# Altium PCB PCB3 - Copy.PcbDoc
Units mm, origin at the board's own origin, x right, y up, seen from the top; angles counter-clockwise.
Board outline 118.36 x 117.86 mm, 2 copper layers (Top Layer, Bottom Layer); 105 components, 67 nets, 259 pads, 0 vias.
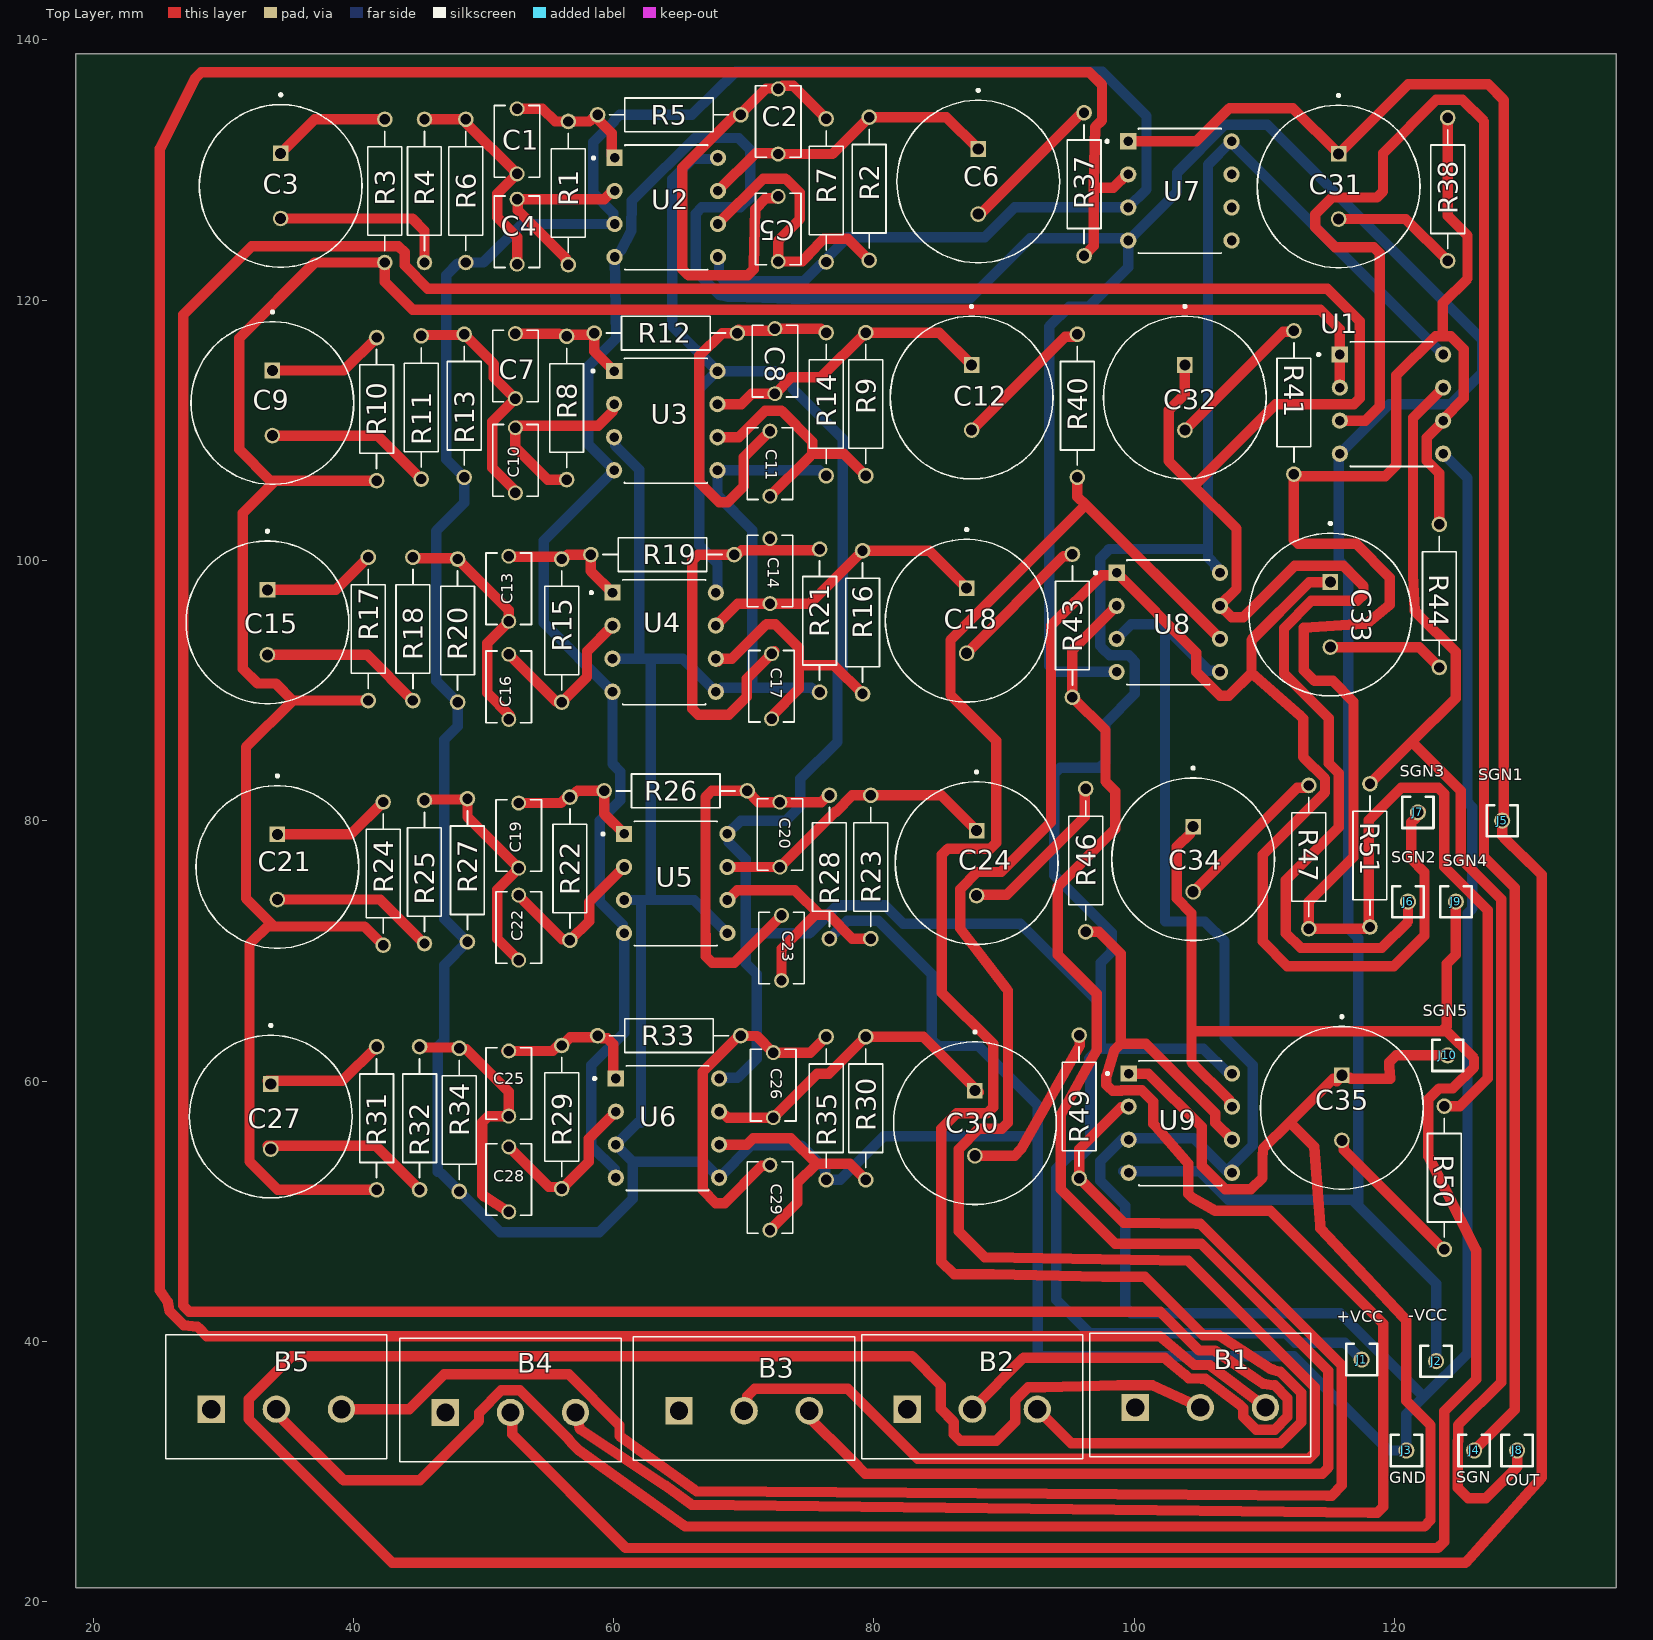
[diagram p0: Top Layer view]
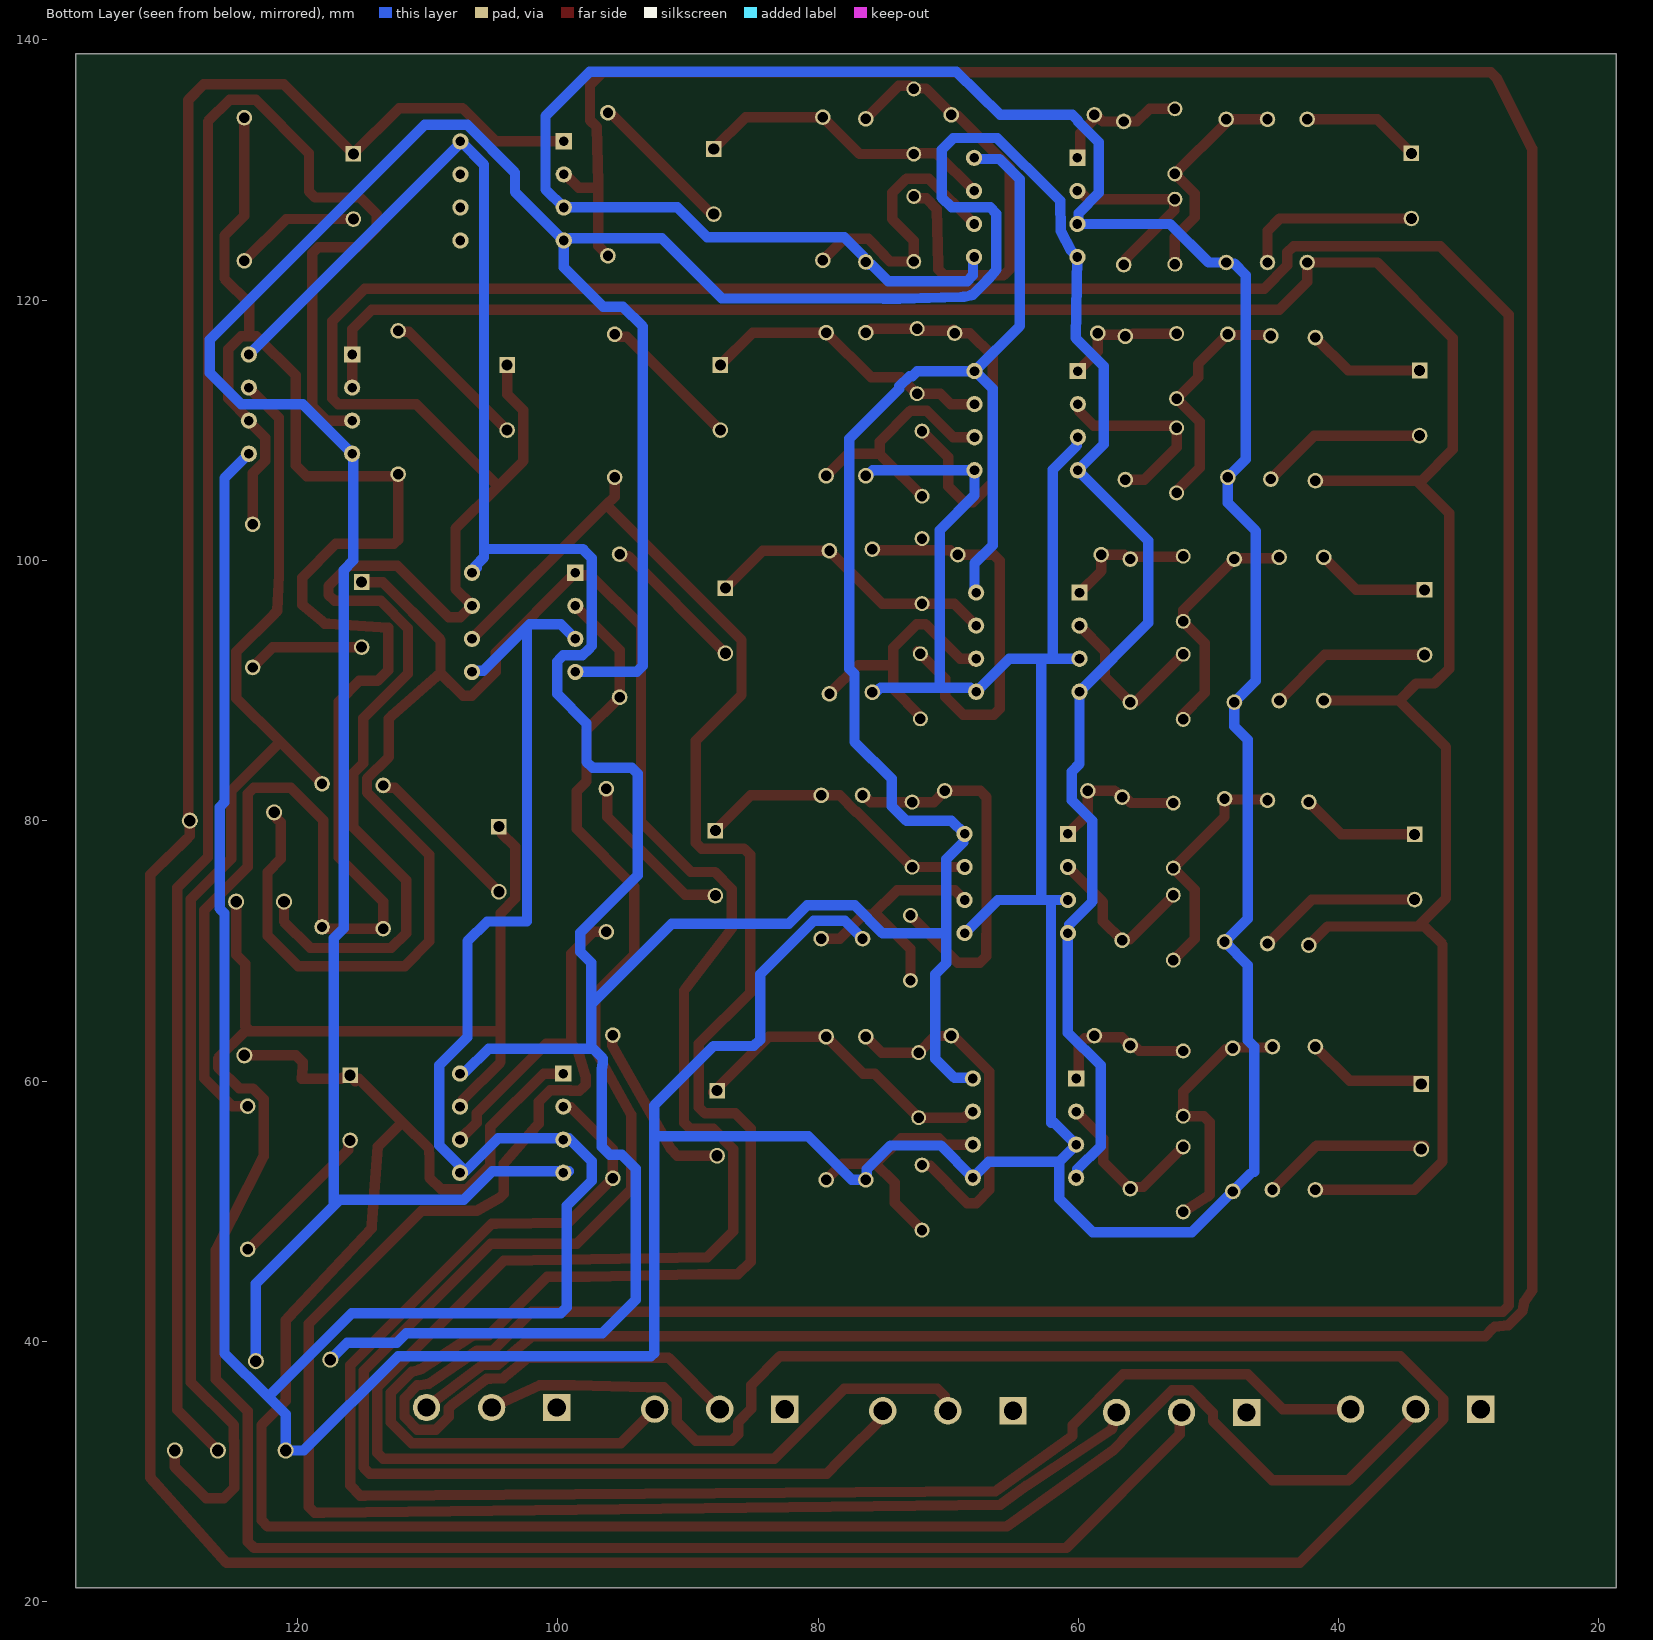
[diagram p1: Bottom Layer view, seen from below]
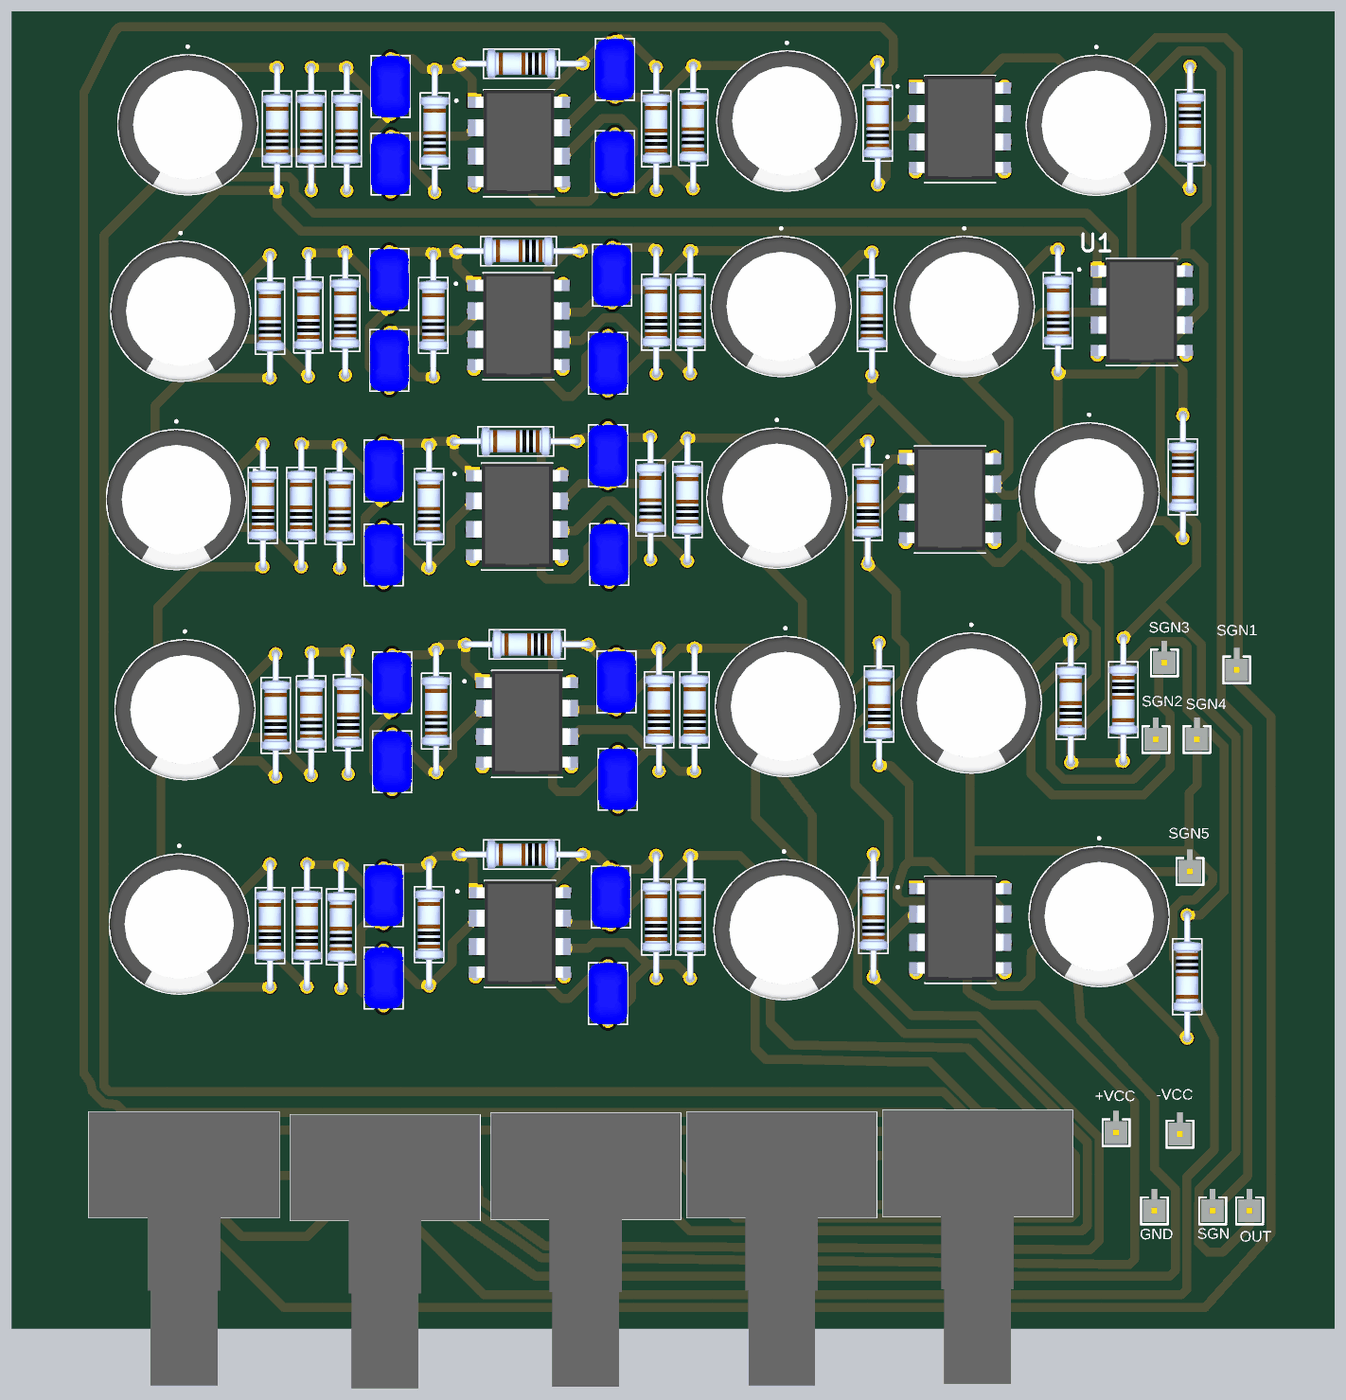
[diagram p2: 3D render of the assembled board from above, using the file's embedded part models]

## Layer stack, top to bottom
Top Solder: solder mask 0.0102, Solder Resist, Dk 3.5
Top Layer: signal copper 0.0356
Dielectric 1: dielectric 0.32, FR-4, Dk 4.8
Bottom Layer: signal copper 0.0356
Bottom Solder: solder mask 0.0102, Solder Resist, Dk 3.5

## Board outline
18.669,21.082 137.033,21.082 137.033,138.938 18.669,138.938

## Design rules (kind name [scope] priority, off if disabled: settings)
Clearance [All] p1: gap=0.245 ignorepadtopadclearanceinfootprint=FALSE except(0.381: Arc-Hole Track-Hole SMDPad-Hole THPad-Hole Via-Hole Fill-Hole Poly-Hole Region-Hole Text-Hole)
ComponentClearance [All] p1: gap=0.381 collisioncheckmode=3 verticalgap=0.381 showdistances=FALSE
MinimumSolderMaskSliver [All] p1: minsoldermaskwidth=0.2
PolygonConnect [All] p1: connectstyle=Relief reliefconductorwidth=0.254 reliefentries=4 polygonreliefangle="90 Angle" airgapwidth=0.254
RoutingVias [All] p1: holewidth=0.711 width=1.27 viastyle="Through Hole" minholewidth=0.711 minwidth=1.27 maxholewidth=0.711 maxwidth=1.27
SilkToSolderMaskClearance [IsPad] p1: minsilkscreentomaskgap=0.2 clearancetoexposedcopper=TRUE
SolderMaskExpansion [All] p1: expansion=0.102 istentingtop=FALSE
Width [All] p1: maxlimit=1 minlimit=0.254 preferedwidth=0.8
27 further rules are at their usual default settings.

## Components (designator, comment, footprint, x,y, rotation, side; value= is the part's Value field where it differs from the comment)
B1 "P160KN-0QC15B10K" P160KN0QC15B10K 100.076,34.925 r270 top
B2 "P160KN-0QC15B10K" P160KN0QC15B10K 82.55,34.798 r270 top
B3 "P160KN-0QC15B10K" P160KN0QC15B10K 65.024,34.671 r270 top
B4 "P160KN-0QC15B10K" P160KN0QC15B10K 47.07,34.544 r270 top
B5 "P160KN-0QC15B10K" P160KN0QC15B10K 29.083,34.798 r270 top
C1 "6.8nF" CAPRB500W50L550T350H600 52.578,132.207 r90 top
C2 "68nF" CAPRB500W50L550T350H600 72.644,133.731 r270 top
C3 "10uF" CAPPRD500W60D1250H2000 34.417,128.778 r270 top
C4 "6.8nF" CAPRB500W50L550T350H600 52.578,125.262 r90 top
C5 "68nF" CAPRB500W50L550T350H600 72.644,125.476 r270 top
C6 "10uF" CAPPRD500W60D1250H2000 88.011,129.119 r270 top
C7 "100nF" CAPRB500W50L550T350H600 52.451,114.935 r90 top
C8 "100nF" CAPRB500W50L550T350H600 72.39,115.316 r270 top
C9 "10uF" CAPPRD500W60D1250H2000 33.782,112.101 r270 top
C10 "100nF" CAPRB500W50L550T350H600 52.451,107.696 r90 top
C11 "100nF" CAPRB500W50L550T350H600 72.009,107.442 r270 top
C12 "10uF" CAPPRD500W60D1250H2000 87.503,112.522 r270 top
C13 "3.3nF" CAPRB500W50L550T350H600 51.943,97.83 r90 top
C14 "100nF" CAPRB500W50L550T350H600 72.009,99.187 r270 top
C15 "10uF" CAPPRD500W60D1250H2000 33.401,95.25 r270 top
C16 "3.3nF" CAPRB500W50L550T350H600 51.943,90.297 r90 top
C17 "100nF" CAPRB500W50L550T350H600 72.136,90.337 r270 top
C18 "10uF" CAPPRD500W60D1250H2000 87.122,95.377 r270 top
C19 "15nF" CAPRB500W50L550T350H600 52.705,78.867 r90 top
C20 "33nF" CAPRB500W50L550T350H600 72.771,78.942 r270 top
C21 "10uF" CAPPRD500W60D1250H2000 34.163,76.454 r270 top
C22 "15nF" CAPRB500W50L550T350H600 52.705,71.795 r90 top
C23 "33nF" CAPRB500W50L550T350H600 72.898,70.231 r270 top
C24 "10uF" CAPPRD500W60D1250H2000 87.884,76.748 r270 top
C25 "1nF" CAPRB500W50L550T350H600 51.943,59.817 r90 top
C26 "1nF" CAPRB500W50L550T350H600 72.263,59.69 r270 top
C27 "10uF" CAPPRD500W60D1250H2000 33.655,57.277 r270 top
C28 "1nF" CAPRB500W50L550T350H600 51.943,52.451 r90 top
C29 "1nF" CAPRB500W50L550T350H600 72.009,51.054 r270 top
C30 "10uF" CAPPRD500W60D1250H2000 87.757,56.769 r270 top
C31 "10uF" CAPPRD500W60D1250H2000 115.697,128.738 r270 top
C32 "10uF" CAPPRD500W60D1250H2000 103.886,112.522 r270 top
C33 "10uF" CAPPRD500W60D1250H2000 115.062,95.845 r270 top
C34 "10uF" CAPPRD500W60D1250H2000 104.521,77.049 r270 top
C35 "10uF" CAPPRD500W60D1250H2000 115.951,57.952 r270 top
J1 "+VCC" SAMTEC_MTMM-101-XX-X-S-XXX 117.475,38.608 r0 top
J2 "-VCC" SAMTEC_MTMM-101-XX-X-S-XXX 123.19,38.481 r0 top
J3 "GND" SAMTEC_MTMM-101-XX-X-S-XXX 120.904,31.623 r0 top
J4 "SGN" SAMTEC_MTMM-101-XX-X-S-XXX 126.111,31.623 r0 top
J5 "SGN1" SAMTEC_MTMM-101-XX-X-S-XXX 128.27,80.01 r0 top
J6 "SGN2" SAMTEC_MTMM-101-XX-X-S-XXX 121.031,73.787 r0 top
J7 "SGN3" SAMTEC_MTMM-101-XX-X-S-XXX 121.793,80.645 r0 top
J8 "OUT" SAMTEC_MTMM-101-XX-X-S-XXX 129.413,31.623 r0 top
J9 "SGN4" SAMTEC_MTMM-101-XX-X-S-XXX 124.714,73.787 r0 top
J10 "SGN5" SAMTEC_MTMM-101-XX-X-S-XXX 124.079,61.976 r0 top
R1 "180K" RESAD1100W55L680D260 56.515,128.231 r90 top
R2 "47K" RESAD1100W55L680D260 79.629,128.563 r90 top
R3 "1K" RESAD1100W55L680D260 42.418,128.397 r90 top
R4 "47K" RESAD1100W55L680D260 45.466,128.397 r90 top
R5 "15K" RESAD1100W55L680D260 64.262,134.239 r180 top
R6 "68K" RESAD1100W55L680D260 48.641,128.397 r90 top
R7 "15K" RESAD1100W55L680D260 76.327,128.436 r90 top
R8 "4.7K" RESAD1100W55L680D260 56.388,111.721 r90 top
R9 "10K" RESAD1100W55L680D260 79.375,112.014 r90 top
R10 "1K" RESAD1100W55L680D260 41.783,111.633 r90 top
R11 "1.5K" RESAD1100W55L680D260 45.212,111.76 r90 top
R12 "3.3K" RESAD1100W55L680D260 64.008,117.475 r180 top
R13 "1K" RESAD1100W55L680D260 48.514,111.887 r90 top
R14 "2.2K" RESAD1100W55L680D260 76.327,112.014 r90 top
R15 "3.3K" RESAD1100W55L680D260 56.007,94.615 r90 top
R16 "2.2K" RESAD1100W55L680D260 79.121,95.25 r90 top
R17 "1K" RESAD1100W55L680D260 41.148,94.742 r90 top
R18 "1K" RESAD1100W55L680D260 44.577,94.742 r90 top
R19 "1K" RESAD1100W55L680D260 63.754,100.457 r180 top
R20 "680" RESAD1100W55L680D260 48.006,94.615 r90 top
R21 "680" RESAD1100W55L680D260 75.819,95.377 r90 top
R22 "3.3K" RESAD1100W55L680D260 56.642,76.327 r90 top
R23 "3.3K" RESAD1100W55L680D260 79.756,76.454 r90 top
R24 "1K" RESAD1100W55L680D260 42.291,75.946 r90 top
R25 "1K" RESAD1100W55L680D260 45.466,76.073 r90 top
R26 "1K" RESAD1100W55L680D260 64.77,82.296 r180 top
R27 "470" RESAD1100W55L680D260 48.768,76.2 r90 top
R28 "470" RESAD1100W55L680D260 76.581,76.454 r90 top
R29 "100K" RESAD1100W55L680D260 56.007,57.238 r90 top
R30 "100K" RESAD1100W55L680D260 79.375,57.912 r90 top
R31 "1K" RESAD1100W55L680D260 41.783,57.15 r90 top
R32 "2.2K" RESAD1100W55L680D260 45.085,57.15 r90 top
R33 "33K" RESAD1100W55L680D260 64.262,63.5 r180 top
R34 "1.5K" RESAD1100W55L680D260 48.133,57.023 r90 top
R35 "2.2K" RESAD1100W55L680D260 76.327,57.912 r90 top
R37 "1K" RESAD1100W55L680D260 96.139,128.905 r90 top
R38 "1K" RESAD1100W55L680D260 124.079,128.524 r270 top
R40 "1K" RESAD1100W55L680D260 95.631,111.887 r90 top
R41 "1K" RESAD1100W55L680D260 112.268,112.141 r90 top
R43 "1K" RESAD1100W55L680D260 95.25,94.996 r90 top
R44 "1K" RESAD1100W55L680D260 123.444,97.282 r270 top
R46 "1K" RESAD1100W55L680D260 96.266,76.962 r90 top
R47 "1K" RESAD1100W55L680D260 113.411,77.216 r90 top
R49 "1K" RESAD1100W55L680D260 95.758,58.039 r90 top
R50 "1K" RESAD1100W55L680D260 123.825,52.578 r270 top
R51 "1K" RESAD1100W55L680D260 118.11,77.343 r270 top
U1 "LM4562NA" DIP794W45P254L959H508Q8 119.761,112.014 r0 top
U2 "LM4562NA" DIP794W45P254L959H508Q8 64.041,127.127 r0 top
U3 "LM4562NA" DIP794W45P254L959H508Q8 64.008,110.744 r0 top
U4 "LM4562NA" DIP794W45P254L959H508Q8 63.881,93.726 r0 top
U5 "LM4562NA" DIP794W45P254L959H508Q8 64.77,75.184 r0 top
U6 "LM4562NA" DIP794W45P254L959H508Q8 64.135,56.388 r0 top
U7 "LM4562NA" DIP794W45P254L959H508Q8 103.505,128.397 r0 top
U8 "LM4562NA" DIP794W45P254L959H508Q8 102.616,95.25 r0 top
U9 "LM4562NA" DIP794W45P254L959H508Q8 103.538,56.769 r0 top

## Footprints (in the part's own frame and the unit in brackets; to place one, negate y for a bottom-side part, rotate by r counter-clockwise, add the part's x,y. Pads: shape width x height; smd on the part's side, far side on the other; paste and mask are expansions set on the pad)
CAPPRD500W60D1250H2000 [mm]
  round 1.2 hole 0.85: N(2.5,0)
  rect 1.2x1.2 hole 0.85: P(-2.5,0)
  silkscreen extent -7.1,-6.25 6.25,6.25, body extent -6.25,-6.25 6.25,6.25, height 20
CAPRB500W50L550T350H600 [mm]
  round 1.15 hole 0.8 mask+0.254: 1(-2.5,0) 2(2.5,0)
  silkscreen extent -2.75,-1.75 2.75,1.75, body extent -2.75,-1.75 2.75,1.75, height 6.81
DIP794W45P254L959H508Q8 [mm]
  rect 1.248x1.248 / inner round 1.248 / far side rect 1.248x1.248 hole 0.74: 1(-3.97,3.81)
  round 1.248 hole 0.74: 2(-3.97,1.27) 3(-3.97,-1.27) 4(-3.97,-3.81) 5(3.97,-3.81) 6(3.97,-1.27) 7(3.97,1.27) 8(3.97,3.81)
  silkscreen extent -5.69,-4.79 3.17,4.79, body extent -5.46,-4.51 5.46,4.76, height 5.33
P160KN0QC15B10K [mm]
  rect 2.1x2.1 hole 1.4: 1(0,0)
  round 2.1 hole 1.4: 2(0,5) 3(0,10)
  silkscreen extent -5.7,-3.5 3.8,13.5, body extent -10,-3.38 10,3.38, height 5.8
RESAD1100W55L680D260 [mm]
  round 1.2 hole 0.8: 1(-5.5,0) 2(5.5,0)
  silkscreen extent -4.58,-1.3 4.58,1.3, body extent -5.77,-1.3 5.77,1.3, height 2.6
SAMTEC_MTMM-101-XX-X-S-XXX [mm]
  round 1.24 hole 0.89: 01(0,0)
  silkscreen extent -1.2,-1.2 1.2,1.2, body extent -1.02,-0.98 0.98,1.02, height 7.23

## Part data
B1 B2 B3 B4 B5: "Potentiometers 16mm Rotary Panel Potentiometer", Manufacturer_Name="TT Electronics", Mouser Part Number=858-P160KN-0QC15B10K, Arrow Part Number=P160KN-0QC15B10K, Arrow Price/Stock=https://www.arrow.com/en/products/p160kn-0qc15b10k/bi-technologies, Datasheet Link=https://datasheet.datasheetarchive.com/originals/distributors/Datasheets-DGA21/91824.pdf, Geometry.Height=16.5mm, Manufacturer_Part_Number=P160KN-0QC15B10K, Mouser Price/Stock=https://www.mouser.co.uk/ProductDetail/BI-Technologies-TT-Electronics/P160KN-0QC15B10K?qs=%252BUYXD5bnyXowj%252Bd8P32cNw%3D%3D
C1 C2 C4 C5 C7 C8 C10 C11 C13 C14 C16 C17 C19 C20 C22 C23 C25 C26 C28 C29: library part FG26X7R2E104KNT06, "0.1ÂµF Â±10% 250V Ceramic Capacitor X7R Radial", Package="Radial TDK", Availability="In Stock", Check_prices=https://www.snapeda.com/parts/FG26X7R2E104KNT06/TDK/view-part/?ref=eda, MF=TDK, MP=FG26X7R2E104KNT06, Price=None, Purchase-URL=https://pricing.snapeda.com/search/part/FG26X7R2E104KNT06/?ref=eda, SnapEDA_Link=https://www.snapeda.com/parts/FG26X7R2E104KNT06/TDK/view-part/?ref=snap
C3 C6 C9 C12 C15 C18 C21 C24 C27 C30 C31 C32 C33 C34 C35: library part ECA2WM100B, "CAP ALUM 10UF 20% 450V RADIAL", Package="RADIAL-2 Panasonic", Availability="In Stock", Check_prices=https://www.snapeda.com/parts/ECA-2WM100B/Panasonic/view-part/2313535/?ref=eda, MF=Panasonic, MP=ECA-2WM100B, Price=None, Purchase-URL=https://pricing.snapeda.com/search/part/ECA-2WM100B/?ref=eda, SnapEDA_Link=https://www.snapeda.com/parts/ECA-2WM100B/Panasonic/view-part/2313535/?ref=snap
J1 J2 J3 J4 J5 J6 J7 J8 J9 J10: library part MTMM-101-XX-X-S-XXX, "Connector Header position", Package=None, Availability=Unavailable, MP=MTMM-101-XX-X-S-XXX, Price=None
R1 R2 R3 R4 R5 R6 R7 R8 R9 R10 R11 R12 R13 R14 R15 R16 R17 R18 R19 R20 R21 R22 R23 R24 R25 R26 R27 R28 R29 R30 R31 R32 R33 R34 R35 R37 R38 R40 R41 R43 R44 R46 R47 R49 R50 R51: library part MFR-25FBF52-1K, "1.78 kOhms Â±1% 0.25W, 1/4W Through Hole Resistor Axial - Metal Film", Package="Axial Yageo", Availability="In Stock", Check_prices=https://www.snapeda.com/parts/MFR-25FBF52-1K/Yageo/view-part/?ref=eda, MF=Yageo, MP=MFR-25FBF52-1K, Price=None, Purchase-URL=https://pricing.snapeda.com/search/part/MFR-25FBF52-1K/?ref=eda, SnapEDA_Link=https://www.snapeda.com/parts/MFR-25FBF52-1K/Yageo/view-part/?ref=snap
U1 U2 U3 U4 U5 U6 U7 U8 U9: "LM4562 2 - Dual Channels per IC Audio Amplifier Evaluation Board", Package="DIP-8 Texas Instruments", Availability="In Stock", Check_prices=https://www.snapeda.com/parts/LM4562NA/Texas+Instruments/view-part/?ref=eda, MF="Texas Instruments", MP=LM4562NA, Price=None, Purchase-URL=https://pricing.snapeda.com/search/part/LM4562NA/?ref=eda, SnapEDA_Link=https://www.snapeda.com/parts/LM4562NA/Texas+Instruments/view-part/?ref=snap

## Nets (pads, with @x,y where several pads share a name; then routed paths per layer and width w, separated by ;. In a path a pad name is that pad's centre, name@x,y a point inside that pad or via, vN(x,y) a via of type N, cw(c..) or ccw(c..) an arc to the next point about the centre after c; other vN are vias at no path point)
+VCC: J1.01 U1.8 U2.8 U3.8 U4.8 U5.8 U6.8 U7.8 U8.8 U9.8 | length 308.5
  Bottom Layer w0.8: U4.8 67.851,97.657 67.978,97.784 67.978,99.78 66.573,101.185 66.573,113.189 U3.8@67.938,114.554 ; U2.8 67.925,130.851 66.081,130.851 64.516,129.286 64.516,118.016 U3.8 72.39,114.554 72.772,114.172 72.952,114.172 73.746,113.378 73.746,113.198 77.597,109.347 77.597,91.694 77.2,91.297 77.2,86.09 74.33,83.22 74.33,81.135 73.205,80.01 69.756,80.01 U5.8 68.826,78.908 68.826,78.355 70.145,77.036 70.145,71.374 ; U6.8 68.154,60.247 69.518,60.247 70.993,61.722 70.993,62.97 71.007,62.984 71.007,64.016 70.993,64.03 70.993,68.199 70.145,69.047 70.145,71.374 ; 96.539,61.661 96.539,61.346 96.608,60.921 96.608,54.956 95.994,54.342 95.096,54.342 94.015,53.261 94.015,43.195 96.174,41.036 96.57,40.64 111.633,40.64 112.366,39.907 116.176,39.907 J1.01 ; 96.539,61.741 97.282,62.484 97.409,62.484 ; U8.8@106.209,99.437 U8.8 ; U8.8@106.343,99.572 105.664,100.251 105.664,100.885 ; U9.8@107.094,60.706 105.316,62.484 97.409,62.484 ; U7.8@107.389,132.121 105.664,130.396 105.664,100.885 ; U7.8 107.475,132.086 107.699,131.862 107.699,131.856 U1.8 ; 70.145,71.374 75.048,71.374 77.19,73.516 80.817,73.516 82.236,72.098 91.224,72.098 97.409,65.913 ; 97.409,62.484 97.409,65.913 ; 97.409,65.913 97.409,69.088 98.269,69.948 98.269,71.412 93.853,75.828 93.853,83.605 94.322,84.074 97.321,84.074 97.79,84.543 97.79,87.494 100.051,89.755 100.051,92.242 99.821,92.476 ccw(c99.251,91.915) 99.812,92.485 99.582,92.711 99.261,92.715 ccw(c99.251,91.915) 99.172,92.711 98.12,92.711 97.631,93.2 97.377,93.454 97.377,100.171 97.857,100.651 98.091,100.885 105.664,100.885
-VCC: J2.01 U1.4 U2.4 U3.4 U4.4 U5.4 U6.4 U7.4 U8.4 U9.4 | length 333
  Bottom Layer w0.8: U6.4 60.079,52.664 60.079,53.217 58.293,55.003 58.293,61.214 60.8,63.721 U5.4 60.714,71.46 60.714,72.013 58.928,73.799 58.928,80.001 59.842,80.915 60.515,81.588 60.515,83.782 59.911,84.386 U4.4 54.626,95.201 54.626,101.522 U3.4 58.039,108.933 58.039,114.935 60.198,117.094 U2.4 60.54,123.786 61.34,125.331 61.39,127.638 61.858,128.106 66.213,132.461 69.596,132.461 70.485,131.572 70.485,127.889 69.724,127.128 66.763,127.128 66.294,126.659 66.294,122.368 66.868,121.674 67.245,121.285 68.116,120.414 68.266,120.367 68.801,120.256 69.018,120.245 73.75,120.099 74.968,120.099 87.398,120.164 91.998,124.764 99.042,124.764 99.132,124.673 99.449,124.673 U7.4 ; U8.4 93.941,91.44 93.472,91.909 93.472,117.983 94.996,119.507 96.52,119.507 99.535,122.522 U7.4 ; U9.4@99.154,53.086 105.029,53.086 107.227,50.888 116.752,50.888 117.221,50.419 ; U1.4@115.697,107.793 115.697,100.015 116.447,99.265 116.447,71.746 117.221,70.971 117.221,50.419 ; U1.4 119.6,112.013 124.332,112.013 126.746,114.427 126.746,116.95 110.22,133.476 106.949,133.476 103.285,129.812 103.285,128.337 U7.4 ; J2.01 123.19,44.45 117.221,50.419
GND: J3.01 R6.1 R7.1 R13.1 R14.1 R20.1 R21.1 R27.1 R28.1 R34.1 R35.1 U1.5 U2.3 U2.5 U3.3 U3.5 U4.3 U4.5 U5.3 U5.5 U6.3 U6.5 U7.3 U8.3 U8.5 U9.3 U9.5 | length 612
  Top Layer w0.254: U5.3 60.8,74.008 U5.3@60.833,74.041 ; U9.5@107.094,53.086 U9.5@107.363,53.086
  Bottom Layer w0.8: 46.482,53.034 46.482,62.633 46.99,63.141 46.99,68.922 R27.1 46.99,72.478 46.99,86.233 48.006,87.249 R20.1 46.355,90.766 46.355,102.269 48.514,104.428 R13.1 47.133,107.768 47.133,121.936 48.017,122.82 48.169,122.82 R6.1 49.999,122.897 52.959,125.857 U2.3 59.985,125.943 59.985,126.688 58.42,128.253 58.42,132.136 60.007,133.723 60.007,133.77 60.476,134.239 65.99,134.239 69.39,137.541 97.536,137.541 100.94,134.137 100.94,128.532 U7.3 90.805,127.127 88.519,124.841 77.978,124.841 R7.1@76.527,123.39 ; 46.752,52.904 R34.1 51.269,48.387 58.906,48.387 61.468,50.949 61.468,53.815 ; U4.3 61.976,92.456 ; U3.3 60.124,109.388 60.124,108.835 61.976,106.983 61.976,92.456 ; U5.3 62.103,73.914 ; 61.849,56.802 U6.3 61.468,53.815 ; 62.103,56.802 62.103,73.914 ; 62.484,92.456 61.976,92.456 ; 62.611,92.456 62.865,92.456 ; U2.5 68.097,123.231 68.097,121.911 68.549,121.459 74.596,121.459 75.873,122.736 76.019,122.736 76.219,122.936 R7.1 ; U5.5 66.2,73.914 62.738,73.914 ; R21.1 75.563,89.877 75.201,90.239 70.635,90.239 ; R14.1 76.219,106.514 75.799,106.934 U3.5 67.978,104.996 70.635,102.339 70.635,90.239 ; R28.1 77.962,72.335 80.328,72.335 84.455,68.208 84.455,63.17 84.924,62.701 88.026,62.701 92.599,58.128 92.599,55.753 ; U8.3 99.763,95.097 102.134,95.097 102.362,94.869 ; U8.5 106.5,91.526 105.705,91.526 102.362,94.869 ; U1.5 125.603,106.332 125.603,81.418 125.979,81.042 125.979,73.263 125.603,72.887 125.603,39.105 122.243,35.745 ; 61.468,53.815 66.868,53.815 U6.5 70.585,55.058 74.428,55.058 76.25,53.235 76.25,52.489 R35.1 77.422,52.412 80.763,55.753 92.599,55.753 ; 62.103,73.914 62.738,73.914 ; 62.738,73.914 62.865,74.041 62.865,92.456 ; 62.865,92.456 65.311,92.456 U4.5 67.972,89.916 68.296,90.239 70.635,90.239 ; 92.599,55.753 92.599,39.1 92.837,38.862 112.268,38.862 119.507,31.623 J3.01 120.904,34.406 122.243,35.745 ; 102.362,94.869 102.362,72.263 105.41,72.263 106.934,70.739 106.934,63.373 109.093,61.214 109.093,55.085 107.094,53.086 104.554,55.626 99.154,55.626 97.387,53.859 97.387,52.354 99.314,50.427 99.314,42.633 99.783,42.164 115.824,42.164 122.243,35.745
NetB1_2: B1.2 C31.P J5.01 U7.1 | length 331.5
  Top Layer w0.8: U7.1 104.775,132.207 107.315,134.747 112.188,134.747 C31.P 121.045,136.586 127.193,136.586 128.397,135.382 128.397,80.448 128.354,80.405 J5.01@128.354,80.213 ; B1.2@105.283,34.798 B1.2 101.393,36.62 98.759,36.62 93.072,36.493 91.848,36.493 90.855,35.5 90.855,33.832 89.408,32.385 86.614,32.385 86.14,32.859 86.14,33.811 85.141,34.81 85.141,36.652 82.922,38.871 35.265,38.871 31.951,35.556 31.951,34.04 43.004,22.987 125.434,22.987 131.318,29.569 131.318,75.847 131.081,76.085 128.515,78.603 128.281,78.836 128.278,79.163 J5.01
NetB1_3: B1.3 R37.1 U7.2 | length 269.3
  Top Layer w0.8: R37.1 96.901,124.167 96.901,128.651 98.398,128.651 ; 96.901,128.731 96.901,129.032 96.998,133.311 97.52,133.833 97.52,136.541 96.531,137.53 28.31,137.53 27.878,137.098 25.119,131.623 25.119,44.236 25.119,43.93 25.736,43.04 25.879,42.327 26.96,41.246 28.02,41.134 28.142,41.012 28.75,40.404 101.959,40.404 102.164,40.234 104.61,38.201 105.811,38.185 B1.3@110.283,34.798 ; 98.454,128.708 U7.2@99.328,129.581
NetB2_2: B2.2 C32.P J6.01 U8.7 | length 393
  Top Layer w0.8: B2.2 91.487,38.735 102.332,38.735 102.553,38.552 cw(c102.043,37.935) 102.556,38.549 103.905,37.428 104.177,37.156 104.603,37.156 105.191,37.148 105.454,37.144 108.108,35.134 108.381,34.861 108.381,34.223 109.374,33.23 110.778,33.23 111.771,34.223 111.771,35.627 110.778,36.62 109.905,36.759 106.181,39.301 104.987,39.301 101.997,42.291 27.393,42.291 27.158,42.525 26.924,42.76 26.924,118.872 32.194,124.142 43.466,124.142 43.935,123.673 43.935,122.667 45.727,120.875 114.837,120.875 117.319,118.393 117.319,112.482 116.85,112.013 110.87,112.013 104.572,105.715 ; C32.P 103.886,112.787 102.641,111.542 102.641,107.645 104.572,105.715 ; J6.01 121.031,72.263 118.999,70.231 112.776,70.231 111.633,71.374 111.633,75.438 115.701,79.506 115.701,83.665 114.939,84.427 114.939,87.88 111.506,91.313 111.506,94.796 113.611,96.901 117.145,96.901 117.614,97.37 117.614,98.032 116.056,99.59 112.319,99.59 108.36,95.631 107.475,95.631 U8.7 106.586,96.562 107.855,97.831 107.855,102.431 104.572,105.715
NetB2_3: B2.3 R40.1 U8.6 | length 144.8
  Top Layer w0.8: B2.3 95.163,32.185 111.211,32.185 112.816,33.79 112.816,36.06 111.211,37.665 110.669,37.821 110.557,37.854 106.691,40.34 106.493,40.467 105.311,40.467 100.82,44.958 97.603,44.958 97.594,44.958 89.112,45.15 89.103,45.15 86.168,45.15 85.179,46.139 85.179,56.35 86.36,57.531 88.685,57.531 89.154,58 89.154,62.865 85.217,66.802 85.217,77.382 85.686,77.851 88.939,77.851 89.408,78.32 89.408,86.142 85.877,89.673 85.877,93.878 93.74,101.741 96.266,104.267 95.631,104.902 R40.1 ; 96.283,104.283 U8.6
NetB3_2: B3.2 C33.P J7.01 U8.1 | length 221.7
  Top Layer w0.8: B3.2 70.273,34.92 70.273,35.791 70.848,36.366 77.97,36.366 83.348,30.988 113.392,30.988 113.627,31.222 113.861,31.457 113.861,36.493 104.155,46.199 88.514,46.455 88.285,46.684 86.517,48.452 86.512,48.469 86.512,54.785 88.061,56.334 89.828,56.334 90.297,56.802 90.297,66.959 90.131,67.174 86.614,71.739 86.614,74.739 87.947,76.071 89.787,76.071 93.599,79.883 93.599,94.996 97.482,98.879 98.465,98.879 U8.1 104.775,92.931 104.775,91.456 106.611,89.621 107.274,89.621 109.006,91.353 ; C33.P 113.458,98.345 109.006,93.893 109.006,91.353 ; J7.01@121.996,80.729 121.573,80.306 121.573,80.171 121.285,79.883 121.285,77.079 122.296,76.068 122.296,71.179 119.951,68.834 111.76,68.834 109.855,70.739 109.855,77.399 114.656,82.2 114.656,83.232 112.987,84.901 112.987,87.844 112.753,88.079 112.734,88.098 109.006,91.353
NetB3_3: B3.3 R43.1 U8.2 | length 127.4
  Top Layer w0.8: B3.3@74.77,34.417 78.324,30.863 79.342,29.845 114.437,29.845 114.906,30.314 114.906,37.748 105.156,47.498 98.552,47.498 94.361,51.689 94.361,57.435 97.108,62.353 97.108,66.722 96.873,66.956 94.107,69.723 94.107,74.932 98.552,79.377 98.552,82.257 97.79,83.019 97.79,86.956 R43.1 95.25,93.124 U8.2
NetB4_2: B4.2 C34.P J9.01 U9.7 | length 175.4
  Top Layer w0.8: B4.2@51.693,34.747 52.197,34.243 52.197,32.863 60.93,24.13 123.333,24.13 123.801,24.599 123.801,30.666 ; C34.P 104.321,79.349 104.321,79.048 103.276,78.003 103.276,74.033 104.394,72.915 104.394,63.828 ; U9.7 107.508,58.16 107.284,58.384 107.284,58.578 104.394,61.468 104.394,63.828 ; 123.801,30.666 123.801,32.58 ; 123.801,32.58 123.801,34.647 126.263,37.109 126.263,47.001 122.58,54.241 122.58,58.594 123.422,59.436 124.46,59.436 126.103,61.079 126.103,61.741 124.016,63.828 123.641,63.828 ; J9.01 124.714,69.723 124.016,69.025 124.016,64.203 123.641,63.828 ; 104.394,63.828 123.641,63.828
NetB4_3: B4.3 R46.1 U9.6 | length 136.1
  Top Layer w0.8: B4.3 57.415,33.254 64.002,28.901 66.008,27.442 117.995,26.826 118.657,26.826 119.126,27.295 119.126,41.346 110.434,50.038 106.227,50.038 104.452,51.037 104.374,51.115 104.14,51.349 104.14,53.669 103.944,53.894 ; R46.1 97.27,71.462 98.958,69.774 98.958,62.873 ; 103.943,53.895 101.67,56.505 101.473,56.731 101.473,57.031 101.473,58.42 100.585,59.308 99.042,59.308 98.992,59.258 98.329,59.258 98.095,59.492 97.861,59.726 97.861,60.389 98.489,62.404 98.958,62.873 ; U9.6 107.508,55.523 106.23,56.801 106.23,57.522 100.88,62.873 98.958,62.873
NetB5_2: B5.2 C35.P J10.01 U9.1 | length 169.5
  Top Layer w0.8: B5.2@33.782,34.798 39.243,29.337 45.091,29.337 49.657,33.903 49.657,34.528 51.368,36.239 52.772,36.239 56.503,32.509 56.543,32.465 56.869,32.086 57.249,31.707 57.295,31.66 65.307,25.93 65.515,25.781 122.287,25.781 122.756,26.25 122.756,33.013 122.756,33.581 120.904,35.433 120.904,41.63 120.688,41.86 114.296,48.693 114.275,48.973 113.816,54.967 113.607,55.176 111.934,56.849 ; U9.1 101.092,60.579 105.185,56.486 105.185,53.487 106.982,51.69 108.967,51.69 109.852,52.575 109.852,54.412 109.887,54.447 109.887,54.803 111.934,56.849 ; 115.282,60.198 114.816,59.732 111.934,56.849 ; C35.P@115.542,59.975 C35.P ; C35.P@115.951,60.252 116.566,60.252 116.62,60.198 119.664,60.198 119.598,61.06 119.598,61.454 119.83,61.686 120.119,61.976 J10.01
NetB5_3: B5.3 R49.1 U9.2 | length 124.4
  Top Layer w0.8: B5.3 44.312,34.798 46.979,37.465 56.546,37.465 60.447,33.564 60.447,32.733 66.158,28.645 66.364,28.497 114.825,28.148 115.159,28.148 115.951,28.94 115.951,38.181 105.312,48.82 105.081,49.051 104.755,49.055 99.181,49.116 98.963,49.334 R49.1 95.758,54.77 98.998,58.01 U9.2@99.154,58.01
NetC1_1: C1.1 C4.1 R4.2 R6.2 | length 17.2
  Top Layer w0.8: R4.2 R6.2 48.641,133.644 C1.1 51.054,128.183 51.054,126.365 52.578,124.841 C4.1@52.578,122.726
NetC1_2: C1.2 R1.2 R5.2 U2.1 | length 10.7
  Top Layer w0.8: C1.2 54.523,134.707 55.499,133.731 58.146,133.731 58.673,134.258 R5.2@58.782,134.258 ; R5.2 58.839,134.162 58.839,133.82 59.847,132.812 59.847,131.161 U2.1
NetC2_1: C2.1 C5.1 R5.1 R7.2 | length 35.2
  Top Layer w0.8: C2.1@72.59,136.348 72.505,136.263 71.702,136.263 69.762,134.323 R5.1 69.685,134.162 69.249,134.162 65.278,130.191 65.278,122.389 65.747,121.92 69.977,121.92 70.292,121.92 70.76,122.389 70.776,122.703 70.866,127 71.688,127.822 72.49,127.822 C5.1 ; C2.1@72.64,136.298 72.806,136.298 72.978,136.47 73.793,136.47 R7.2
NetC2_2: C2.2 C6.P R2.2 U2.7 | length 23.3
  Top Layer w0.8: U2.7 70.912,131.298 C2.2@72.57,131.298 ; C2.2 76.797,131.231 R2.2 85.567,134.063 C6.P
NetC3_N: C3.N R4.1 | length 13.9
  Top Layer w0.8: C3.N 44.511,126.278 45.466,125.323 R4.1
NetC3_P: C3.P R3.2 | length 9.1
  Top Layer w0.8: C3.P 37.036,133.897 R3.2
NetC4_2: C4.2 R1.1 U2.2 | length 14.4
  Top Layer w0.8: R1.1 56.515,122.839 56.315,123.039 56.315,123.209 52.625,126.899 52.625,127.715 C4.2 59.285,127.762 59.92,128.397 U2.2
NetC5_2: C5.2 R2.1 U2.6 | length 22.6
  Top Layer w0.8: U2.6 71.486,129.332 73.206,129.332 74.295,128.243 74.295,126.238 72.644,124.587 C5.2 74.477,122.976 74.946,123.445 74.946,123.508 76.152,124.714 77.978,124.714 R2.1
NetC6_N: C6.N R37.2 | length 11.4
  Top Layer w0.254: C6.N C6.N@88.182,126.619 ; R37.2@95.968,134.405 R37.2
  Top Layer w0.8: C6.N@88.182,126.619 R37.2@95.968,134.405
NetC7_1: C7.1 C10.1 R11.2 R13.2 | length 18.5
  Top Layer w0.8: R11.2 45.276,117.323 48.45,117.323 R13.2 50.8,115.101 50.8,114.086 C7.1 50.673,110.657 50.673,107.141 C10.1@52.451,105.363
NetC7_2: C7.2 R8.2 R12.2 U3.1 | length 9.8
  Top Layer w0.8: C7.2 55.766,117.435 55.799,117.402 56.207,117.402 R8.2 56.515,117.348 58.381,117.348 R12.2 58.508,117.348 58.508,116.084 U3.1
NetC8_1: C8.1 C11.1 R12.1 R14.2 | length 30.3
  Top Layer w0.8: C11.1 70.01,107.943 70.01,105.697 68.784,104.471 68.122,104.471 66.573,106.02 66.573,115.722 68.326,117.475 R12.1 69.508,117.641 69.596,117.729 69.679,117.646 72.219,117.646 C8.1 75.917,117.816 76.219,117.514 R14.2
NetC8_2: C8.2 C12.P R9.2 U3.7 | length 22.8
  Top Layer w0.8: U3.7 67.984,112.02 69.802,112.02 70.598,112.816 72.4,112.816 73.65,114.066 75.927,114.066 R9.2 85.011,117.514 C12.P
NetC9_N: C9.N R11.1 | length 12.8
  Top Layer w0.8: C9.N 41.871,109.601 R11.1
NetC9_P: C9.P R10.2 | length 9
  Top Layer w0.8: C9.P 39.251,114.601 R10.2
NetC10_2: C10.2 R8.1 U3.2 | length 15.1
  Top Layer w0.8: R8.1 54.942,106.221 52.451,108.712 52.451,110.363 58.801,110.363 59.952,111.514 59.952,111.928 U3.2
NetC11_2: C11.2 R9.1 U3.6 | length 19.5
  Top Layer w0.8: U3.6 69.623,109.474 71.655,111.506 72.898,111.506 75.271,109.133 75.271,108.204 ; C11.2 74.974,107.906 75.271,108.204 ; R9.1 77.685,108.204 75.271,108.204
NetC12_N: C12.N R40.2 | length 11.3
  Top Layer w0.8: C12.N 94.687,117.206 95.45,117.206 R40.2 R40.2@95.797,117.387
NetC13_1: C13.1 C16.1 R18.2 R20.2 | length 18.5
  Top Layer w0.8: R18.2 44.64,100.178 47.942,100.178 R20.2 51.943,96.178 51.943,95.29 50.292,93.639 50.292,89.829 C16.1@52.035,88.086
NetC13_2: C13.2 R15.2 R19.2 U4.1 | length 10.2
  Top Layer w0.8: C13.2@51.903,100.29 55.832,100.29 R15.2 56.115,100.115 56.457,100.457 R19.2 58.254,99.193 U4.1
NetC14_1: C14.1 C17.1 R19.1 R21.2 | length 30.9
  Top Layer w0.8: C17.1@72.344,93.045 70.223,90.924 70.223,89.527 68.834,88.138 66.509,88.138 66.04,88.607 66.04,99.988 66.509,100.457 69.51,100.457 69.851,100.798 75.74,100.798 R21.2
NetC14_2: C14.2 C18.P R16.2 U4.7 | length 22.8
  Top Layer w0.8: U4.7 69.542,96.687 75.058,96.687 R16.2 84.249,100.75 C18.P
NetC15_N: C15.N R18.1 | length 12.6
  Top Layer w0.8: C15.N 41.069,92.75 R18.1
NetC15_P: C15.P R17.2 | length 8.8
  Top Layer w0.8: C15.P 38.656,97.75 R17.2
NetC16_2: C16.2 R15.1 U4.2 | length 13.1
  Top Layer w0.8: C16.2 55.548,89.192 55.93,89.192 R15.1 57.954,91.062 57.954,93.039 U4.2
NetC17_2: C17.2 R16.1 U4.6 | length 20.1
  Top Layer w0.8: U4.6@68.041,92.266 U4.6 69.088,92.456 71.741,95.109 72.404,95.109 74.219,93.294 74.219,91.948 74.219,90.134 C17.2@72.136,88.051 ; 74.549,91.948 76.923,91.948 R16.1
NetC18_N: C18.N R43.2 | length 11.3
  Top Layer w0.8: C18.N 94.56,100.315 95.069,100.315 R43.2
NetC19_1: C19.1 C22.1 R25.2 R27.2 | length 18.8
  Top Layer w0.8: R25.2 45.529,81.636 48.704,81.636 R27.2 48.768,80.304 C19.1 51.054,74.716 51.054,70.946 C22.1@52.714,69.286
NetC19_2: C19.2 R22.2 R26.2 U5.1 | length 10.6
  Top Layer w0.8: C19.2 55.926,81.367 R22.2@56.386,81.827 ; R22.2 56.75,81.827 57.219,82.296 R26.2 59.27,80.524 U5.1
NetC20_1: C20.1 C23.1 R26.1 R28.2 | length 30.3
  Top Layer w0.254: 67.564,69.11 67.713,68.961
  Top Layer w0.8: R26.1 71.124,81.442 C20.1 75.959,81.442 76.471,81.954 R28.2 ; R26.1@70.362,82.296 67.525,82.296 67.056,81.827 67.056,71.263 67.071,71.248 67.071,69.602 67.564,69.11 69.277,69.11 C23.1
NetC20_2: C20.2 C24.P R23.2 U5.7 | length 22.5
  Top Layer w0.8: U5.7 C20.2@72.731,76.454 ; C20.2 77.038,80.709 77.097,80.709 78.342,81.954 R23.2 85.178,81.954 C24.P
NetC21_N: C21.N R25.1 | length 12.7
  Top Layer w0.8: C21.N 42.085,73.954 R25.1
NetC21_P: C21.P R24.2 | length 9.2
  Top Layer w0.8: C21.P 39.799,78.954 R24.2
NetC22_2: C22.2 R22.1 U5.2 | length 12.6
  Top Layer w0.8: C22.2@52.792,74.168 56.056,70.904 56.565,70.904 R22.1 58.111,72.296 58.111,73.765 U5.2
NetC23_2: C23.2 R23.1 U5.6 | length 19.3
  Top Layer w0.8: U5.6 69.502,74.676 73.914,74.676 75.819,72.771 ; C23.2 72.898,70.176 75.493,72.771 76.525,72.771 78.342,70.954 R23.1
NetC24_N: C24.N R46.2 | length 13
  Top Layer w0.8: C24.N 87.961,74.325 90.2,74.325 96.189,80.314 96.189,82.385 R46.2
NetC25_1: C25.1 C28.1 R32.2 R34.2 | length 20.4
  Top Layer w0.8: R32.2 45.148,62.586 48.069,62.586 48.21,62.446 48.679,62.446 51.943,59.182 C25.1 50.38,57.317 49.911,56.848 49.911,51.379 49.911,51.282 50.029,51.164 C28.1
NetC25_2: C25.2 R29.2 R33.2 U6.1 | length 11.4
  Top Layer w0.8: C25.2@51.747,62.317 55.33,62.317 R29.2@55.751,62.738 ; R29.2 56.057,62.738 56.676,63.356 58.51,63.356 58.577,63.423 58.695,63.423 58.762,63.356 58.829,63.423 58.947,63.423 59.07,63.3 59.492,63.3 59.961,62.831 59.961,60.402 U6.1
NetC26_1: C26.1 C29.1 R33.1 R35.2 | length 27.6
  Top Layer w0.8: C29.1 71.942,53.487 71.376,53.487 68.521,50.632 67.859,50.632 66.836,51.655 66.836,60.724 69.412,63.3 69.454,63.3 69.654,63.5 R33.1 69.794,63.468 70.985,63.468 C26.1 75.105,62.19 R35.2
NetC26_2: C26.2 C30.P R30.2 U6.7 | length 24.5
  Top Layer w0.8: U6.7 68.283,57.658 68.751,57.19 C26.2 75.652,60.579 76.542,60.579 R30.2 83.781,63.412 C30.P@88.056,59.137
NetC27_N: C27.N R32.1 | length 13.1
  Top Layer w0.8: C27.N@33.401,55.031 41.704,55.031 R32.1
NetC27_P: C27.P R31.2 | length 9.5
  Top Layer w0.8: C27.P@33.401,60.031 39.164,60.031 R31.2
NetC28_2: C28.2 R29.1 U6.2 | length 13
  Top Layer w0.8: C28.2 53.193,53.701 55.026,51.868 55.877,51.868 R29.1 58.081,53.812 58.081,55.574 U6.2
NetC29_2: C29.2 R30.1 U6.6 | length 19.5
  Top Layer w0.8: U6.6 70.217,55.118 70.725,55.626 73.62,55.626 75.589,53.657 ; C29.2 74.113,50.658 74.113,52.181 75.589,53.657 ; R30.1 78.13,53.657 75.589,53.657
  Bottom Layer w0.254: U6.6 U6.6@68.199,55.118
NetC30_N: C30.N R49.2 | length 13.7
  Top Layer w0.8: C30.N 90.805,54.269 91.295,54.759 95.821,62.764 95.821,63.162 R49.2
NetC31_N: C31.N R38.2 | length 9.7
  Top Layer w0.8: C31.N 120.865,126.238 R38.2
NetC32_N: C32.N R41.2 | length 11.5
  Top Layer w0.8: C32.N 111.428,117.564 112.191,117.564 R41.2
NetC33_N: C33.N R44.2 | length 9
  Top Layer w0.8: C33.N 121.881,93.345 R44.2
NetC34_N: C34.N R47.2 | length 12.3
  Top Layer w0.8: C34.N 112.507,82.535 113.23,82.535 R47.2
NetC35_N: C35.N R50.2 | length 11.5
  Top Layer w0.8: C35.N 116.097,55.306 116.097,54.718 R50.2@123.67,47.145
NetJ4_01: J4.01 U1.3 | length 145.5
  Top Layer w0.8: U1.3 117.755,110.744 118.872,111.861 118.872,123.61 118.403,124.079 115.443,124.079 113.919,125.603 113.919,126.619 115.189,127.889 118.643,127.889 119.111,128.358 119.111,131.303 123.213,135.405 125.199,135.405 126.873,133.731 126.873,77.216 129.238,74.851 129.238,34.75 J4.01
NetJ8_01: J8.01 R51.1 U1.7 | length 104.1
  Top Layer w0.8: R51.1 121.329,86.062 ; U1.7 121.651,111.204 121.417,110.97 121.417,98.953 121.417,98.933 121.558,96.12 121.776,95.902 121.792,95.886 124.689,92.989 124.689,89.422 121.329,86.062 ; J8.01 129.413,30.353 127,27.94 125.661,27.94 124.846,28.754 124.846,31.099 124.846,32.316 124.894,32.364 124.894,33.581 128.193,36.88 128.193,73.991 125.095,77.089 125.095,82.296 121.329,86.062
NetR3_1: R3.1 R10.1 R17.1 R24.1 R31.1 U1.1 U1.2 | length 199.2
  Top Layer w0.8: 33.401,71.882 40.855,71.882 R24.1 R24.1@42.188,70.549 ; 33.58,72.061 32.02,70.501 32.02,59.107 32.02,53.832 34.202,51.65 R31.1 ; 33.73,72.061 31.75,74.041 31.75,85.65 35.342,89.242 ; 33.909,106.045 31.496,103.632 31.496,91.694 32.639,90.551 34.033,90.551 35.342,89.242 ; R17.1 35.342,89.242 ; R10.1 33.627,106.133 31.22,108.54 31.22,117.072 37.045,122.897 R3.1 42.418,121.412 44.577,119.253 114.3,119.253 115.791,117.762 U1.1 U1.2
NetR38_1: R38.1 R41.1 R44.1 R47.1 R50.1 R51.2 U1.6 | length 152.5
  Top Layer w0.8: R44.1 123.444,106.696 122.462,107.678 122.462,109.447 123.731,110.716 U1.6 123.731,110.865 125.32,112.454 125.32,116.222 124.313,117.229 123.698,117.229 ; R50.1 125.007,58.078 126.564,59.635 127.148,60.219 127.148,73.142 123.825,76.465 123.825,82.081 123.356,82.55 120.523,82.55 118.027,80.054 118.027,72.209 118.033,72.202 118.033,71.766 118.027,71.76 118.021,71.766 117.925,71.766 117.875,71.716 R47.1 113.411,73.787 116.84,77.216 116.84,89.154 115.244,90.75 113.853,90.75 113.638,90.95 113.03,91.558 113.03,94.842 117.628,95.135 117.888,95.152 119.634,96.601 119.634,98.679 117.04,101.273 112.595,101.273 112.268,101.6 R41.1 112.483,106.426 112.517,106.46 119.292,106.46 120.142,107.31 120.142,114.222 123.149,117.229 123.698,117.229 ; R38.1 124.079,126.492 125.603,124.968 125.603,121.666 123.698,119.761 123.698,117.229
pads on no net: B1.1 B2.1 B3.1 B4.1 B5.1 U7.5 U7.6 U7.7

## Silkscreen, mask and mechanical layers (free items; w line width, h text height)
Top Component Outline:
  lines w0.125: 24.765,26.543 127.762,26.543 ; 25.4,40.259 25.4,127.635 ; 25.4,127.508 128.397,127.508 128.397,40.259